# EAGLE board md80sv_adapter (EAGLE 8.1.0)
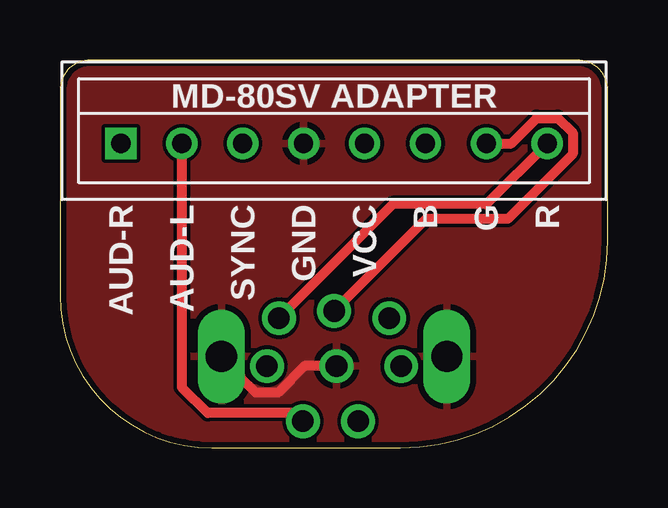
[diagram p0: board, top side]
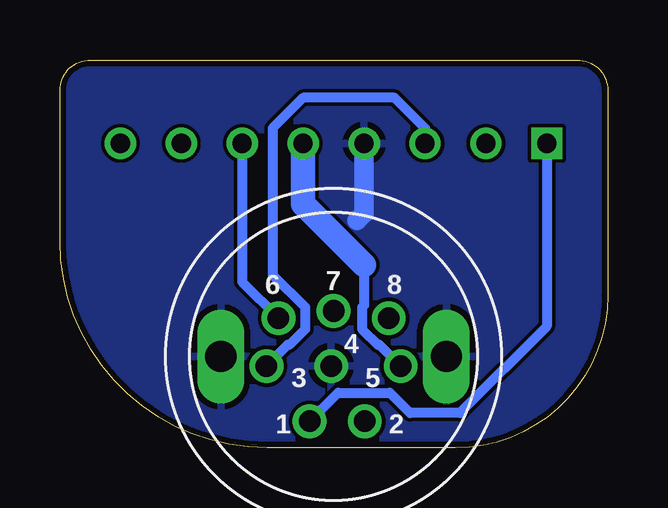
[diagram p1: board, bottom side, seen from below]

Size 22.84 x 16.18 mm. Coordinates in mm from the lower left corner, seen from the top.
Outline: 22.84,8.64 22.84,14.91 arc90 21.57,16.18 1.27,16.18 arc90 0,14.91 0,6.35 arc90 6.35,0 14.2,0 arc90 22.84,8.64
Copper layers (1*16): Top 0.035mm / dielectric 1.5mm / Bottom 0.035mm
Design rules "ITEADstudioDRC": minimum track width 6mil, minimum drill 12mil, track to track 6mil, track to pad 6mil, pad to pad 6mil, via to via 6mil, smd to smd 0mil, copper to edge 10mil, drill to drill 10mil, minimum pad ring 10mil, minimum via ring 6mil, stop-mask expansion 2mil, vias tented up to drill 100mil, thermal gap 10mil

## Footprints (pad centres in the part's own frame; a part is rotated, then mirrored left to right if it is on the bottom)
MD-80SV = drill 1.3 pad 1.676 long: GND@1 -4.7,0; GND@2 4.7,0 | drill 0.9: P$1 -1,-2.7; P$2 1.3,-2.7; P$3 -2.8,-0.4; P$4 -0.1,-0.4; P$5 2.8,-0.4; P$6 -2.3,1.6; P$7 0,1.9; P$8 2.3,1.6
B8B-XH = drill 0.8 square: P$1 -8.89,0 | drill 0.8: P$2 -6.35,0; P$3 -3.81,0; P$4 -1.27,0; P$5 1.27,0; P$6 3.81,0; P$7 6.35,0; P$8 8.89,0

## Placement (x,y rotation side)
U$1  MD-80SV  [MD-80SV]  11.43,3.81 0 bottom
X1  08-JST-B8B-XH-A  [B8B-XH]  11.43,12.7 0 top

## Library data of the parts
U$1 = arcadetv
X1 = con-jst-xh

## Nets
+5V: U$1.P$5 X1.P$5
GND: U$1.GND@1 U$1.GND@2 U$1.P$4 X1.P$4
N$1: U$1.P$1 X1.P$1
N$2: U$1.P$2 X1.P$2
N$3: U$1.P$3 X1.P$3
N$6: U$1.P$6 X1.P$6
N$7: U$1.P$7 X1.P$7
N$8: U$1.P$8 X1.P$8

## Tracks (layer width: path | path; a pad name or v marks a point on that pad's centre or on a via)
+5V
  Bottom 0.406: U$1.P$5 9.52,4.3 9.59,4.3 10.24,4.95 10.24,5.87 10.16,5.95 10.16,7.62
  Bottom 1.016: X1.P$5 12.7,10.16 10.16,7.62
GND
  Top 0.406: U$1.P$4 10.2,3.41 9.09,2.3 8.17,2.3 7.52,2.95 7.52,3.02 U$1.GND@2
  Bottom 0.813: X1.P$4 10.16,9.78 10.45,9.49 | 7.32,3.81 U$1.GND@2
  pour Bottom: 0,16.51 22.86,16.51 22.86,0 0,0
  pour Top: 0,16.51 22.86,16.51 22.86,0 0,0
N$1
  Bottom 0.406: X1.P$1 2.54,5.07 6.16,1.45 8.24,1.45 9.09,2.3 11.24,2.3 U$1.P$1
N$2
  Top 0.406: X1.P$2 5.08,2.53 6.16,1.45 9.79,1.45 U$1.P$2
N$3
  Bottom 0.406: X1.P$3 7.62,13.34 8.89,14.61 12.7,14.61 13.97,13.34 13.97,7.22 12.62,5.87 12.62,4.95 13.27,4.3 13.34,4.3 U$1.P$3
N$6
  Bottom 0.406: X1.P$6 15.24,6.92 U$1.P$6
N$7
  Top 0.406: U$1.P$7 15.27,9.55 18.67,9.55 21.38,12.26 21.38,13.14 20.76,13.76 19.88,13.76 18.82,12.7 X1.P$7
N$8
  Top 0.406: X1.P$8 17.78,10.16 13.88,10.16 U$1.P$8

## Text on the board
tPlace: MD-80SV ADAPTER | AUD-R | AUD-L | SYNC | GND | VCC | B | G | R